# Altium PCB Headstage_Bottom_Plate.PcbDoc
Units mm, origin at the board's own origin, x right, y up, seen from the top; angles counter-clockwise.
Board outline 116.78 x 116.84 mm, 4 copper layers (Top Copper Layer, Internal Copper Layer 1, Internal Copper Layer 2, Bottom Copper Layer), stack 1.58 mm thick; 8 components, 100 nets, 24 pads, 16 vias.
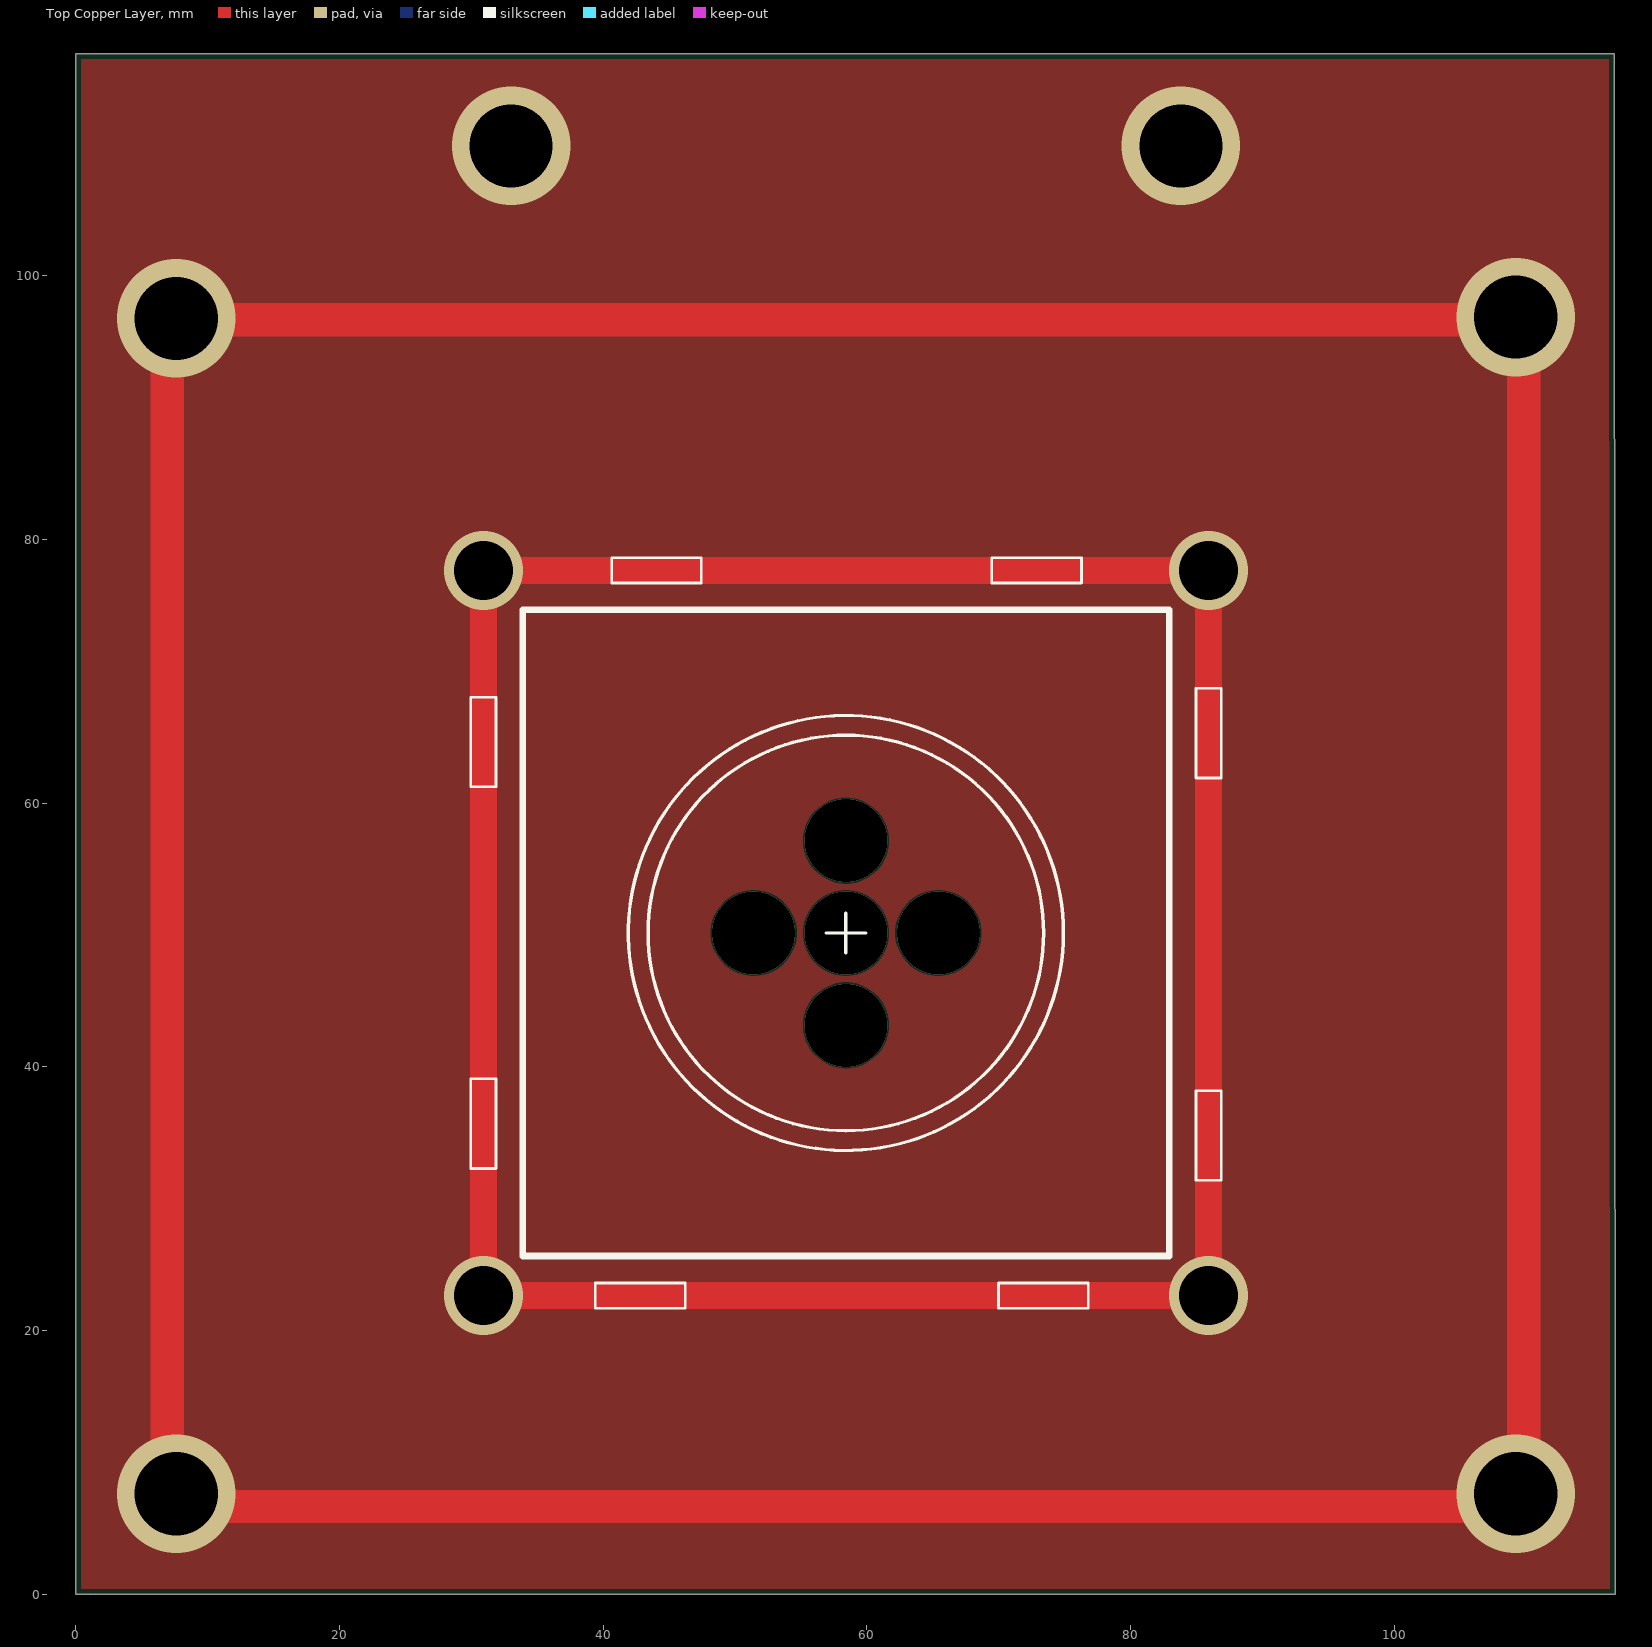
[diagram p0: Top Copper Layer view]
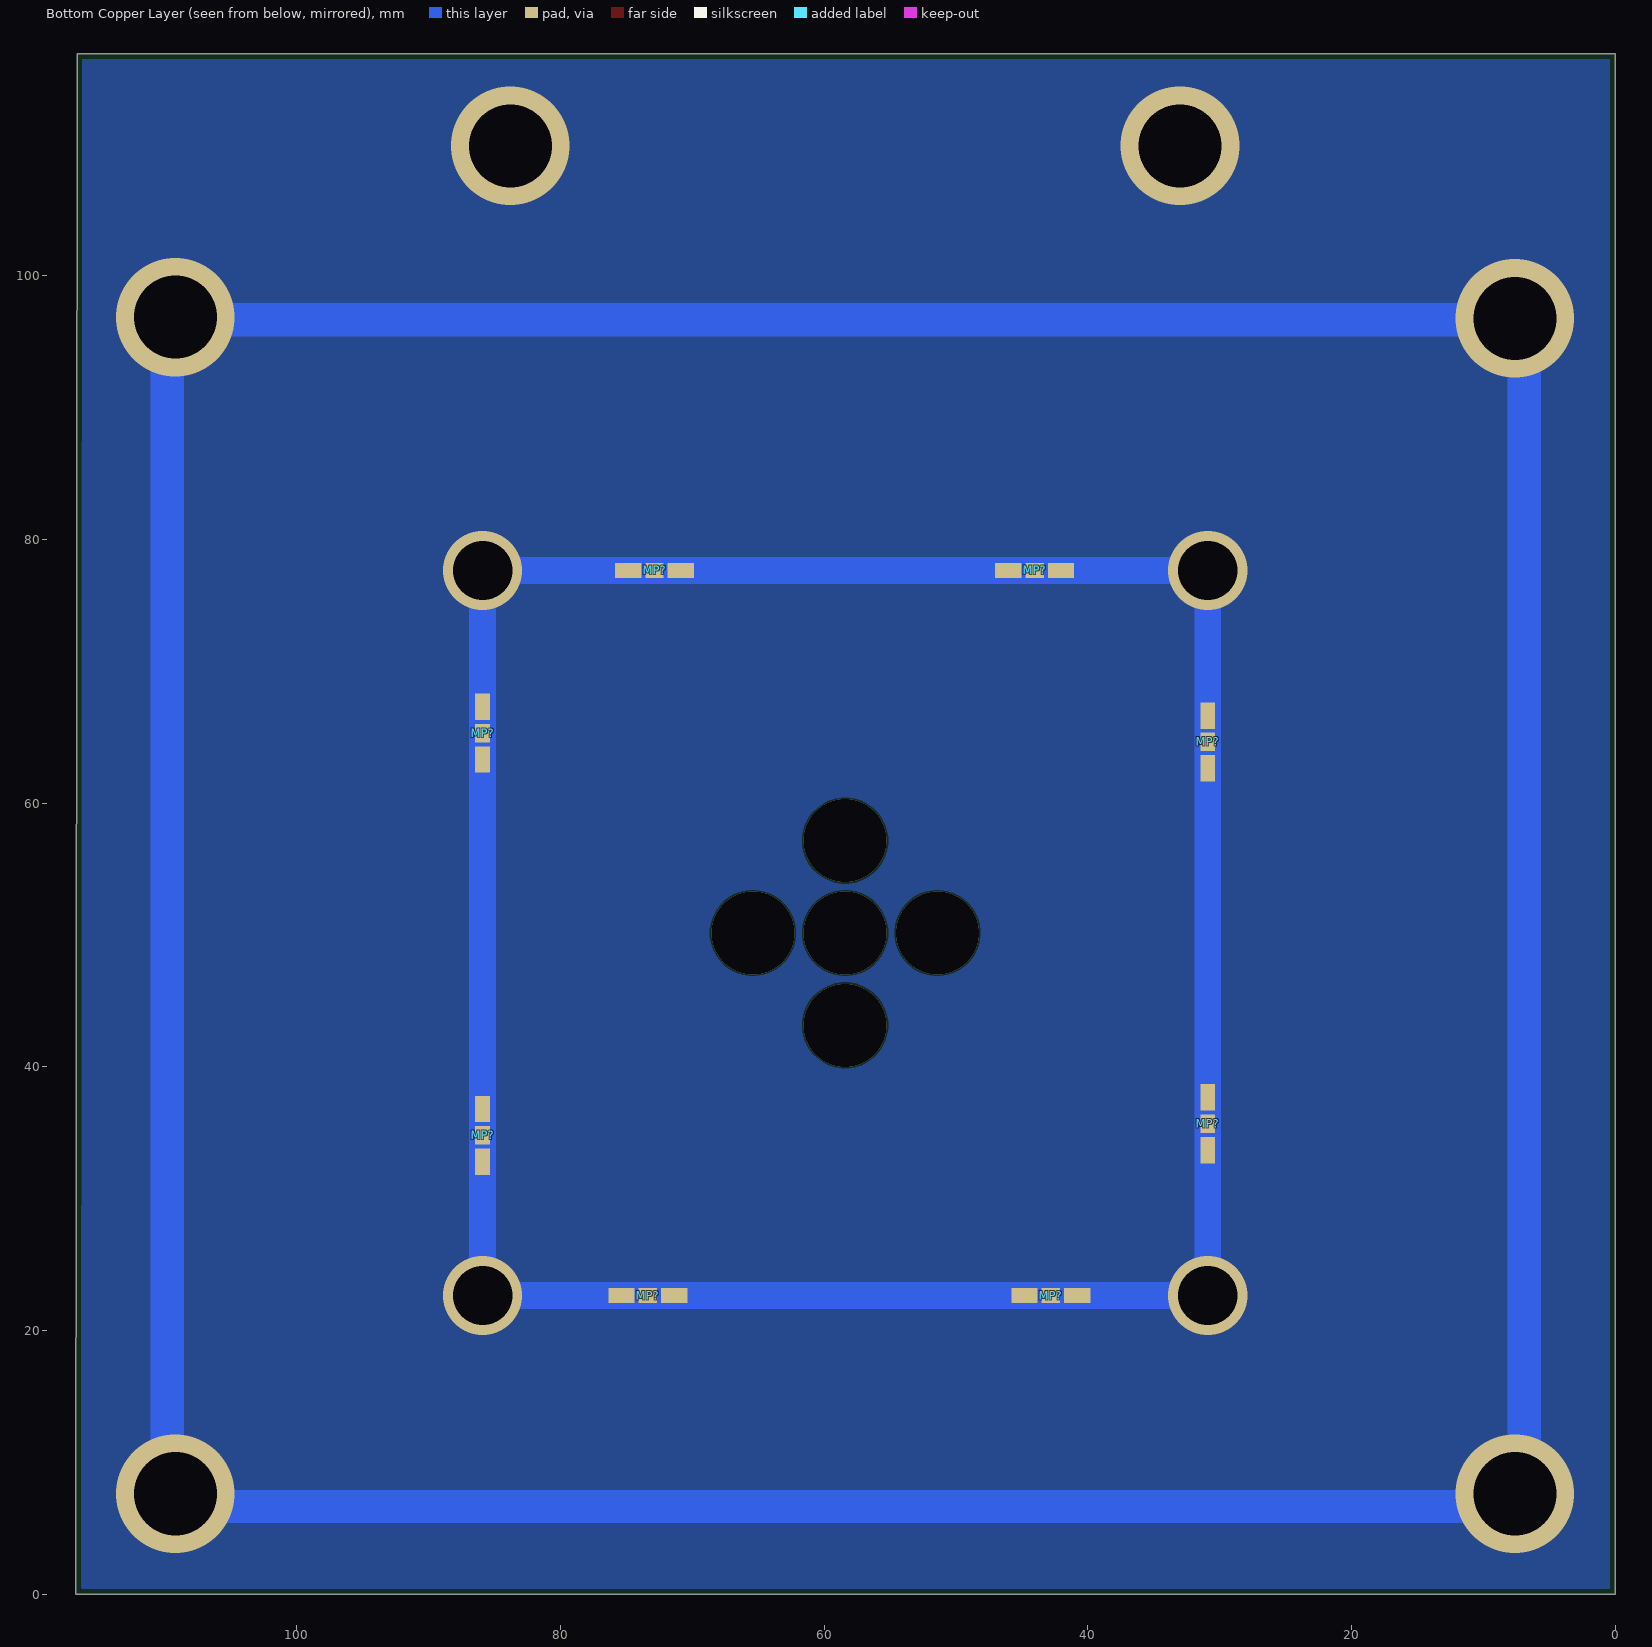
[diagram p1: Bottom Copper Layer view, seen from below]
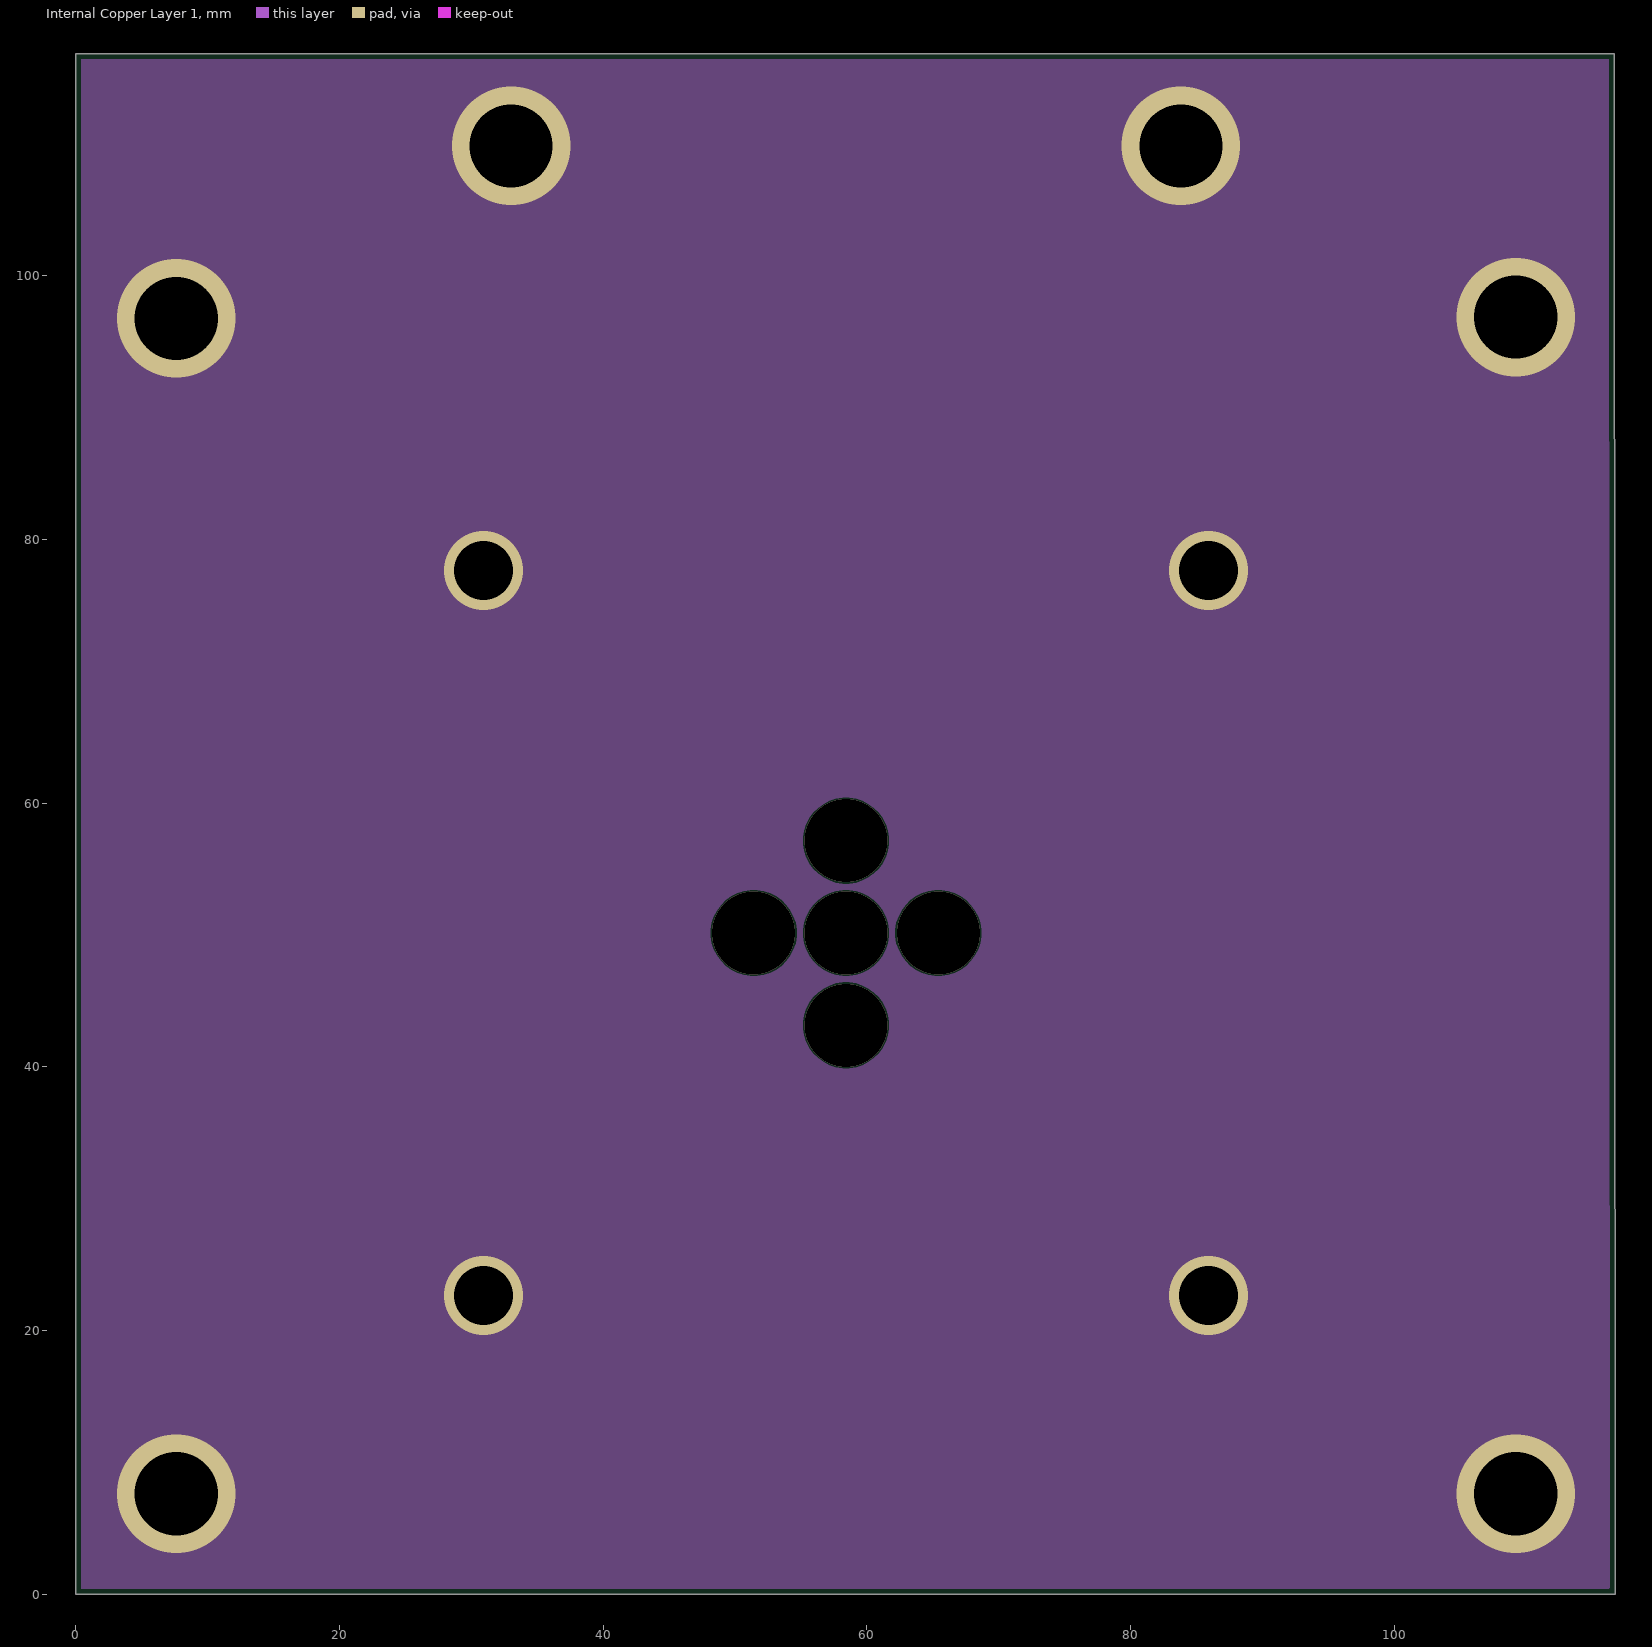
[diagram p2: Internal Copper Layer 1]
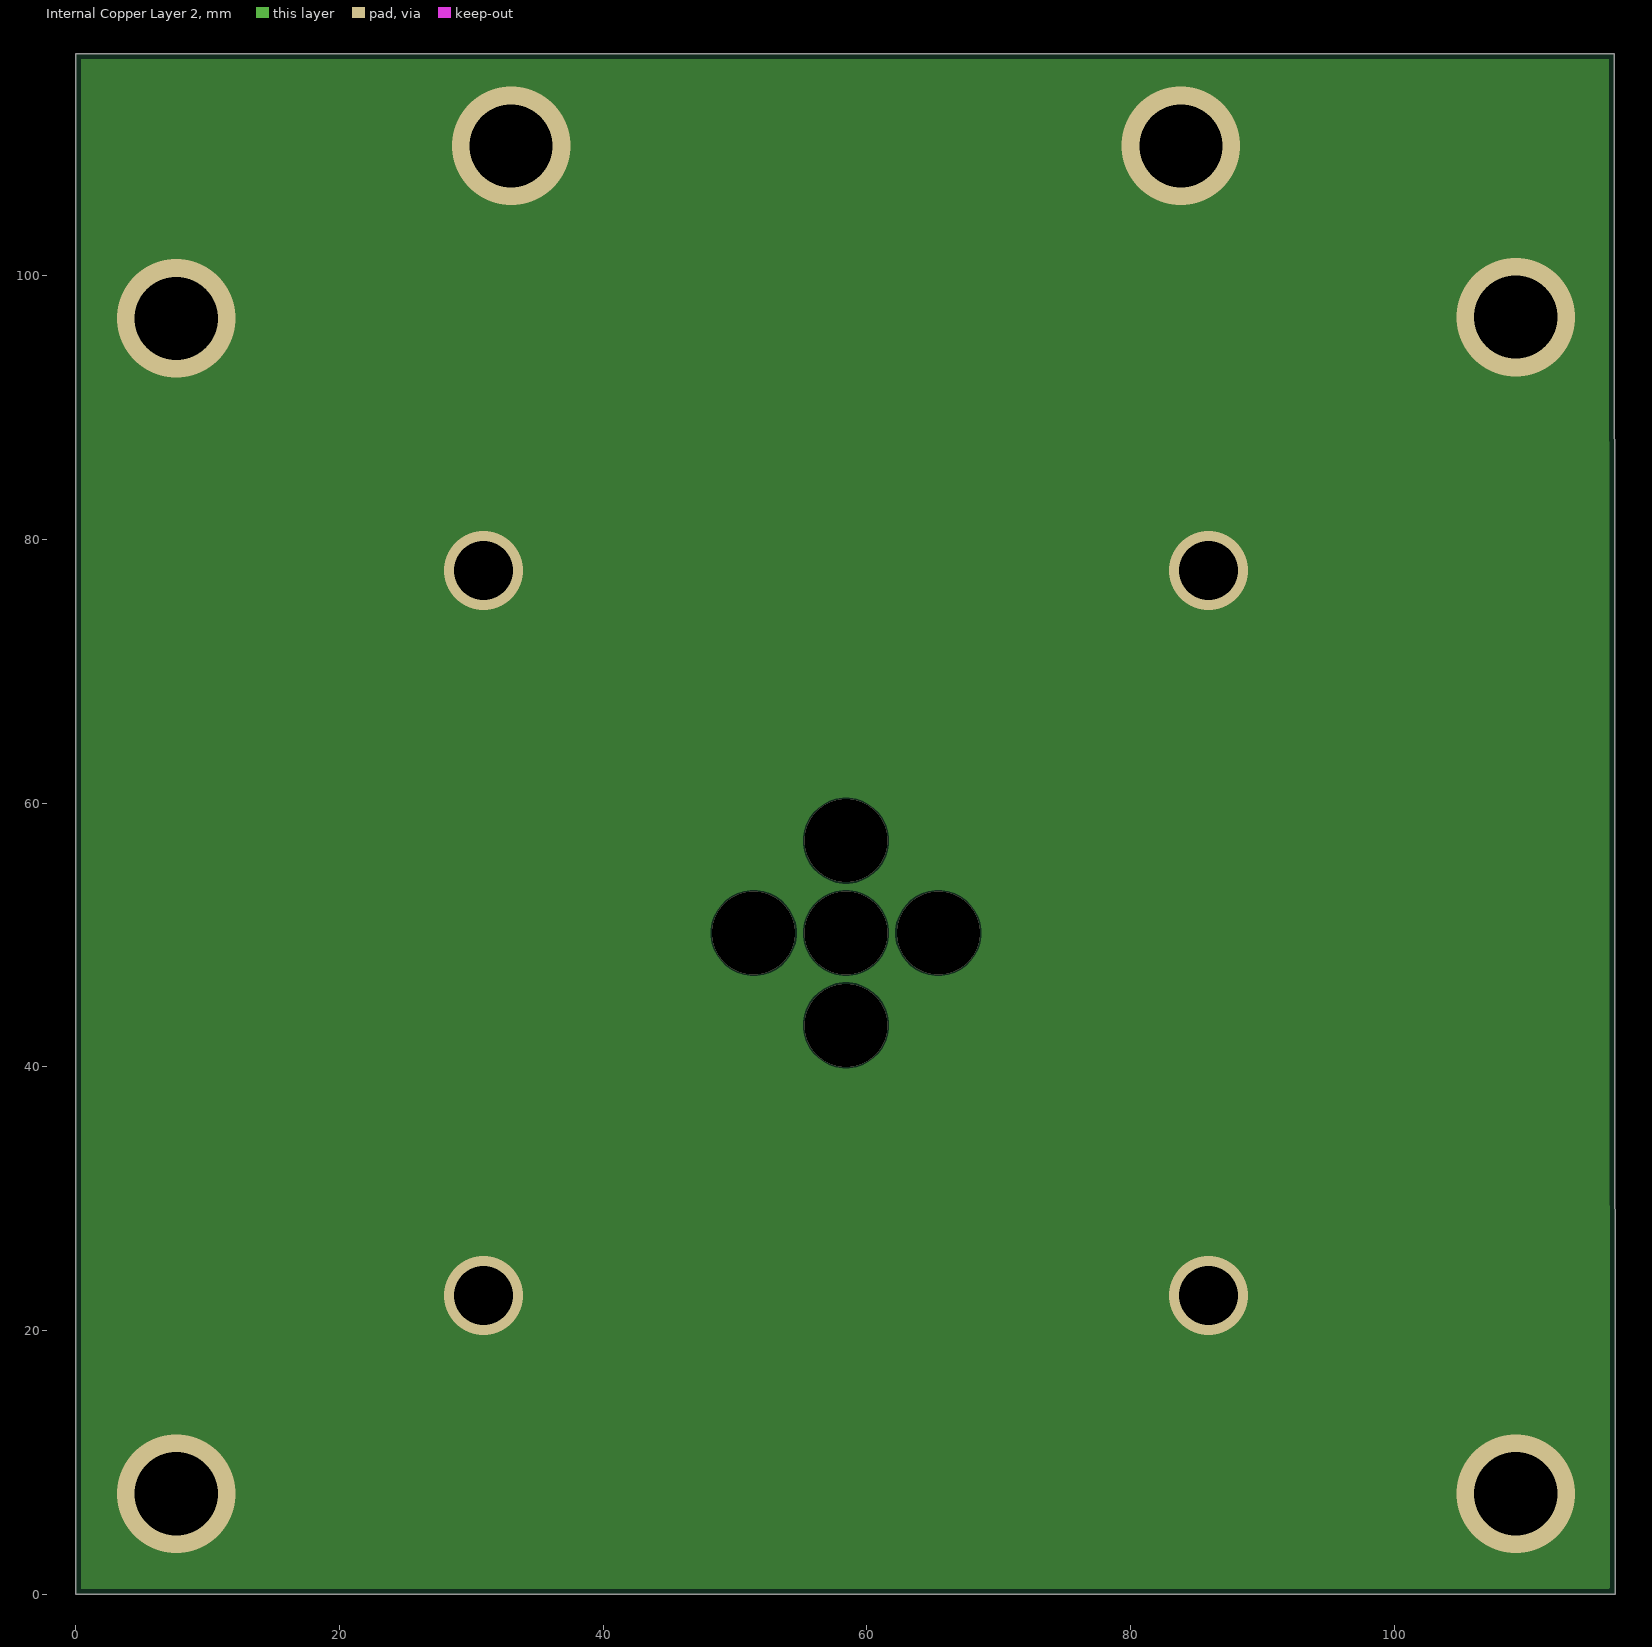
[diagram p3: Internal Copper Layer 2]
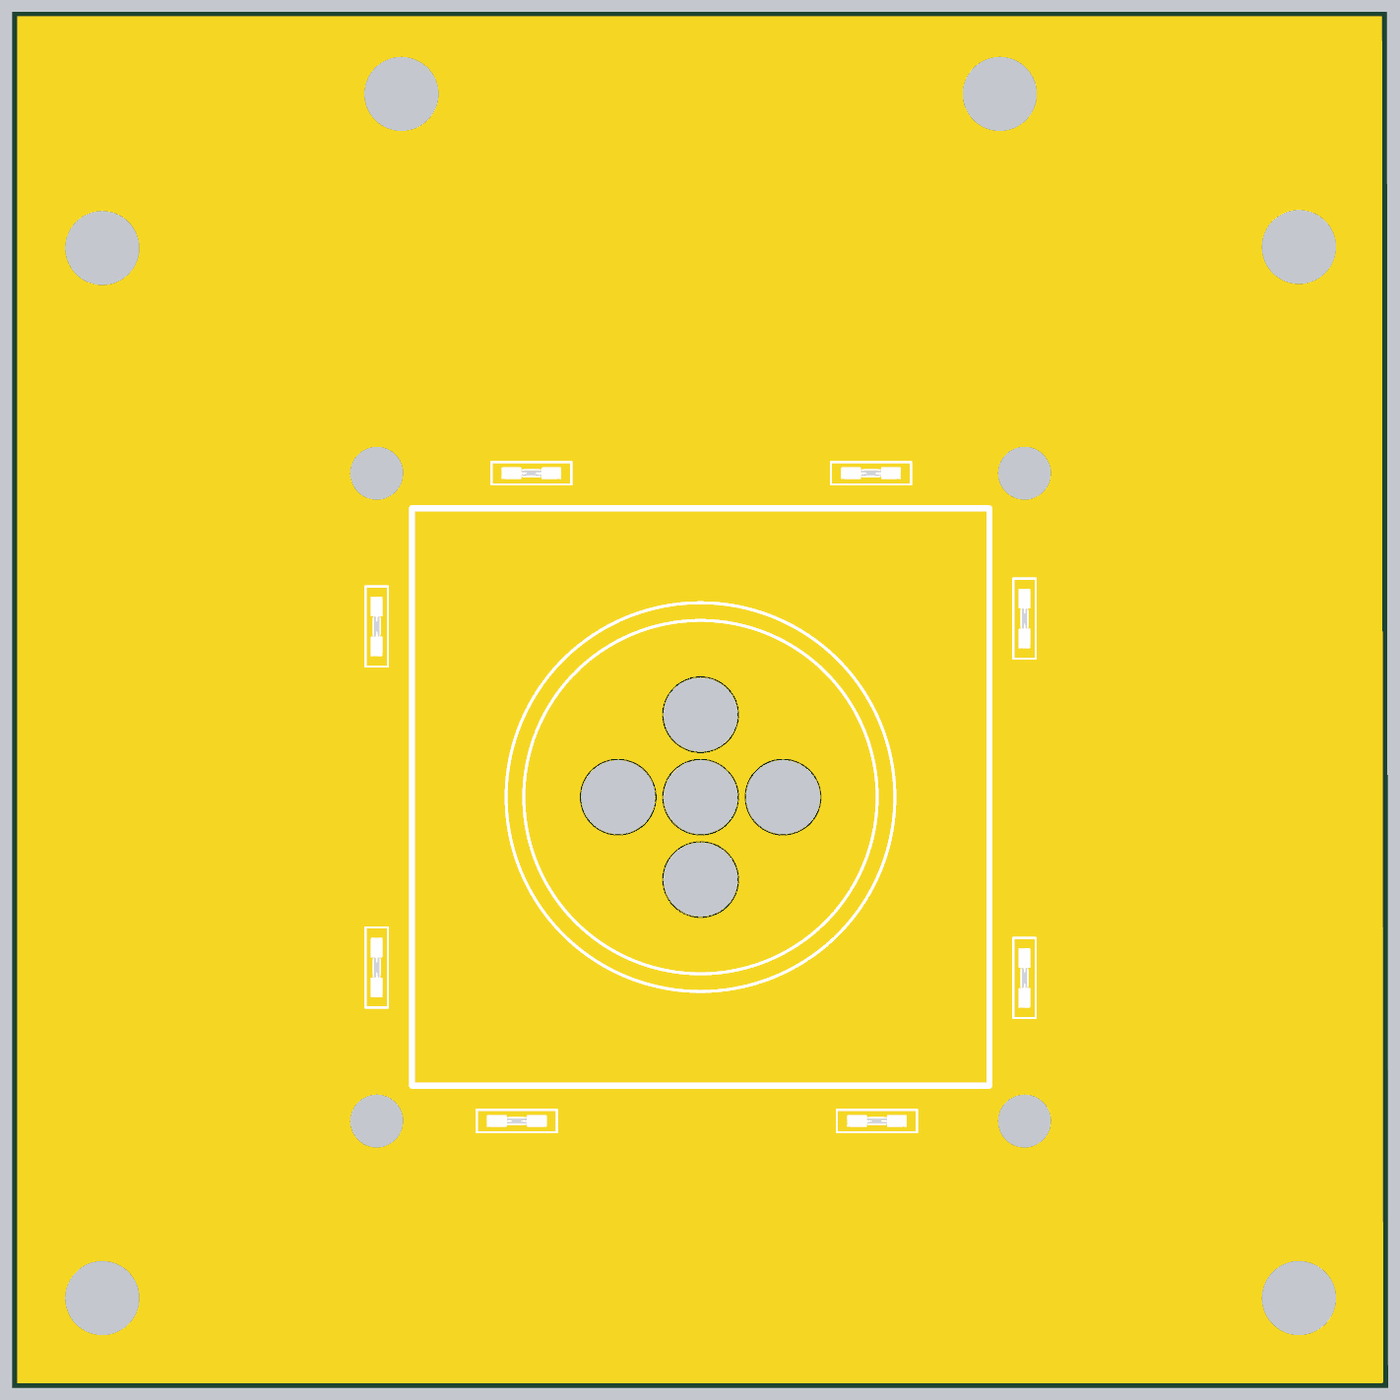
[diagram p4: 3D render of the assembled board from above, using the file's embedded part models]

## Layer stack, top to bottom
Top Solder: solder mask 0.01, Solder Resist, Dk 3.5
Top Copper Layer: signal copper 0.035
Dielectric 1: prepreg 0.22, FR-4, Dk 4.2
Internal Copper Layer 1: signal copper 0.035
Dielectric 2: core 1, FR-4, Dk 4.2
Internal Copper Layer 2: signal copper 0.035
Dielectric 3: prepreg 0.22, FR-4, Dk 4.2
Bottom Copper Layer: signal copper 0.035
Bottom Solder: solder mask 0.01, Solder Resist, Dk 3.5

## Board outline
0,0 116.776,0 116.678,116.84 0,116.84

## Design rules (kind name [scope] priority, off if disabled: settings)
BoardOutlineClearance [All] p1: gap=0.4 ignorepadtopadclearanceinfootprint=FALSE
Clearance [All] p1: gap=0.102 ignorepadtopadclearanceinfootprint=TRUE
ComponentClearance [All] p1: gap=0.15 collisioncheckmode=3 verticalgap=0.15 showdistances=FALSE
DiffPairsRouting [All] p1: maxlimit=0.254 minlimit=0.254 mostfreqgap=0.254 toplayer_minwidth=0.381 toplayer_maxwidth=0.381 toplayer_prefwidth=0.381 midlayer1_minwidth=0.381 midlayer1_maxwidth=0.381 midlayer1_prefwidth=0.381 midlayer2_minwidth=0.381 midlayer2_maxwidth=0.381 midlayer2_prefwidth=0.381 bottomlayer_minwidth=0.381 bottomlayer_maxwidth=0.381 bottomlayer_prefwidth=0.381 maxuncoupledlength=12.7
HoleSize [All] p1: absolutevalues=TRUE maxlimit=0.4 minlimit=0.25 maxpercent=80.000 minpercent=20.000
HoleToHoleClearance [All] p1: gap=0.45 allowstackedmicrovias=TRUE
MinimumAnnularRing [All] p1: minimumring=0.15
MinimumSolderMaskSliver [All] p1: minsoldermaskwidth=0.15
PlaneClearance [All] p1: clearance=0.15
PlaneConnect [All] p1: planeconnectstyle=Direct reliefexpansion=0.25 reliefentries=4 reliefconductorwidth=0.15 reliefairgap=0.15
PolygonConnect [All] p1: connectstyle=Direct reliefconductorwidth=0.15 reliefentries=4 polygonreliefangle="90 Angle" airgapwidth=0.15
RoomDefinition Headstage_V002 [InComponentClass('Headstage_V002')] p1 off: confinementstyle=ConfineIn formatcopy=TRUE lockcomponents=FALSE outline 0,0 50.8,0 50.8,25.4 0,25.4
RoutingVias [All] p1: holewidth=0.25 width=0.55 viastyle="Through Hole" minholewidth=0.25 minwidth=0.55 maxholewidth=0.4 maxwidth=0.8
SilkToSilkClearance [All] p1: silktosilkclearance=0.2
SilkToSolderMaskClearance [IsPad] p1: minsilkscreentomaskgap=0.2 clearancetoexposedcopper=TRUE
SolderMaskExpansion [All] p1: expansion=0.15 istentingtop=FALSE
Width [All] p1: maxlimit=50 minlimit=0.15 preferedwidth=0.15
21 further rules are at their usual default settings.

## Classes and differential pairs
component class Headstage_V002: MP?
differential pair SCLK1h: +SCLK1h_P -SCLK1h_N
differential pair nCS1h: +nCS1h_P -nCS1h_N
differential pair MOSI1h: +MOSI1h_P -MOSI1h_N
differential pair MISO1h: +MISO1h_P -MISO1h_N

## Components (designator, comment, footprint, x,y, rotation, side; value= is the part's Value field where it differs from the comment)
MP? "S0971-46R" FP-S0971-46R-MFG 30.92,64.643 r90 top
MP? "S0971-46R" FP-S0971-46R-MFG 72.881,77.652 r180 top
MP? "S0971-46R" FP-S0971-46R-MFG 44.052,77.652 r180 top
MP? "S0971-46R" FP-S0971-46R-MFG 85.92,65.31 r90 top
MP? "S0971-46R" FP-S0971-46R-MFG 73.389,22.652 r180 top
MP? "S0971-46R" FP-S0971-46R-MFG 30.92,35.687 r90 top
MP? "S0971-46R" FP-S0971-46R-MFG 42.814,22.652 r180 top
MP? "S0971-46R" FP-S0971-46R-MFG 85.92,34.798 r90 top

## Footprints (in the part's own frame and the unit in brackets; to place one, negate y for a bottom-side part, rotate by r counter-clockwise, add the part's x,y. Pads: shape width x height; smd on the part's side, far side on the other; paste and mask are expansions set on the pad)
FP-S0971-46R-MFG [mm]
  rect 2x1.125 smd far side paste+0: 1(-2,0) 1(2,0)
  rect 1.4x1.125 smd far side paste+0: 1(0,0)
  silkscreen extent -3.4,-0.95 3.4,0.95, body extent -2.54,-0.5 2.54,0.5, height 2.18

## Part data
MP? MP? MP? MP? MP? MP? MP? MP?: library part CMP-15817-000004-1, "RFI SHIELD CLIP MINI TIN SMD", Manufacturer=Harwin, Temperature="-25°C to +150°C", Temperature Range High=+150°C, Temperature Range Low=-25°C, Automotive=No, Category=UNK, ComponentLink2Description=Datasheet, ComponentLink2URL=https://cdn.harwin.com/pdfs/S0971-46R.pdf, Conn Orientation=Vertical, Contact Material=Tin,Nickel, Device Class L1=Connectors, Device Class L2=unset, Device Class L3=unset, Digikey Description="RFI SHIELD CLIP MINI TIN SMD", Height=2.1mm, Is Female=yes, Lead Free=Yes, Manufacturer Part Number=S0971-46R, Mouser Description="EZ-Shield Clip, SMT, Mini, Stainless Steel, tin, Tape & Reeled", Number Of Contacts=1, Octopart=https://octopart.com/s0971-46r-harwin-30988305, Package=S0971-46R, RoHS=TRUE

## Via types
v1: diameter 6.3, hole 6.3, Top Copper Layer to Bottom Copper Layer, 6 vias
v2: diameter 9, hole 6.3, Top Copper Layer to Bottom Copper Layer, 6 vias
v3: diameter 6, hole 4.5, Top Copper Layer to Bottom Copper Layer, 4 vias

## Nets (pads, with @x,y where several pads share a name; then routed paths per layer and width w, separated by ;. In a path a pad name is that pad's centre, name@x,y a point inside that pad or via, vN(x,y) a via of type N, cw(c..) or ccw(c..) an arc to the next point about the centre after c; other vN are vias at no path point)
E1_0: 
E1_1: 
E1_2: 
E1_3: 
E1_4: 
E1_5: 
E1_6: 
E1_7: 
E1_8: 
E1_9: 
E1_10: 
E1_11: 
E1_12: 
E1_13: 
E1_14: 
E1_15: 
E2_0: 
E2_1: 
E2_2: 
E2_3: 
E2_4: 
E2_5: 
E2_6: 
E2_7: 
E2_8: 
E2_9: 
E2_10: 
E2_11: 
E2_12: 
E2_13: 
E2_14: 
E2_15: 
E3_0: 
E3_1: 
E3_2: 
E3_3: 
E3_4: 
E3_5: 
E3_6: 
E3_8: 
E3_9: 
E3_10: 
E3_11: 
E3_12: 
E3_13: 
E3_14: 
E3_15: 
E4_0: 
E4_1: 
E4_2: 
E4_3: 
E4_4: 
E4_5: 
E4_6: 
E4_7: 
E4_8: 
E4_9: 
E4_10: 
E4_11: 
E4_12: 
E4_13: 
E4_14: 
E4_15: 
GND: MP?.1 | length 1213.5
  Top Copper Layer w2.032: v3(30.92,22.652) 30.92,33.687 30.92,35.687 30.92,37.687 30.92,62.643 30.92,64.643 30.92,66.643 v3(30.92,77.652) 42.052,77.652 44.052,77.652 46.052,77.652 70.881,77.652 72.881,77.652 74.881,77.652 v3(85.92,77.652) 85.92,67.31 85.92,65.31 85.92,63.31 85.92,36.798 85.92,34.798 85.92,32.798 v3(85.92,22.652) 75.389,22.652 73.389,22.652 71.389,22.652 44.814,22.652 42.814,22.652 40.814,22.652 v3(30.92,22.652)
  Top Copper Layer w2.54: v2@6.92,96.652 v2@109.92,96.652 ; v2@6.92,96.774 6.92,6.652 v2@109.92,6.652 ; v2@109.711,96.774 109.838,96.901 v2@109.838,6.35
  Bottom Copper Layer w2.032: v3(30.92,22.652) 30.92,33.687 30.92,35.687 30.92,37.687 30.92,62.643 30.92,64.643 30.92,66.643 v3(30.92,77.652) 42.052,77.652 44.052,77.652 46.052,77.652 70.881,77.652 72.881,77.652 74.881,77.652 v3(85.92,77.652) 85.92,67.31 85.92,65.31 85.92,63.31 85.92,36.798 85.92,34.798 85.92,32.798 v3(85.92,22.652) 75.389,22.652 73.389,22.652 71.389,22.652 44.814,22.652 42.814,22.652 40.814,22.652 v3(30.92,22.652)
  Bottom Copper Layer w2.54: v2@6.92,96.652 v2@109.92,96.652 ; v2@6.92,96.774 6.92,6.652 v2@109.92,6.652 ; v2@109.838,6.35 v2@109.838,96.863
  other v2: 7.62,7.62 109.22,7.62 7.62,96.774 109.22,96.863 33.02,109.855 83.82,109.855
M1_MISON: 
M1_MISOP: 
M1_MOSIN: 
M1_MOSIP: 
M2_MISON: 
M2_MISOP: 
M2_MOSIN: 
M2_MOSIP: 
M3_MISON: 
M3_MISOP: 
M3_MOSIN: 
M3_MOSIP: 
M4_MISON: 
M4_MISOP: 
M4_MOSIN: 
M4_MOSIP: 
M14_CSN: 
M14_CSP: 
M14_SCLKN: 
M14_SCLKP: 
M23_CSN: 
M23_CSP: 
M23_SCLKN: 
M23_SCLKP: 
MISO1h_N: 
MISO1h_P: 
MOSI1h_N: 
MOSI1h_P: 
nCS1h_N: 
nCS1h_P: 
SCLK1h_N: 
SCLK1h_P: 
VDD: 
VREF: 
VSTIMN: 
VSTIMP: 
copper on no net:
  other v1: 58.42,43.152 51.42,50.152 58.42,50.152 58.42,50.152 65.42,50.152 58.42,57.152

## Polygon pours and split planes (outlines as drawn)
GND on Top Solder "GND_L01_P008" (solid, pour order 8): 117.175,0 0,0 0,116.84 117.175,116.84
no net on Bottom Solder "NONET_L04_P011" (solid, pour order 11): 0,0 117.267,0 117.267,116.84 0,116.84
GND on Bottom Copper Layer "GND_L04_P014" (solid, pour order 14): 0,0 117.267,0 117.267,116.84 0,116.84
GND on Top Copper Layer "GND_L01_P012" (solid, pour order 12): 117.175,0 0,0 0,116.84 117.175,116.84
GND on Internal Copper Layer 2 "GND_L03_P009" (solid, pour order 9): 0,0 117.267,0 117.267,116.84 0,116.84
GND on Internal Copper Layer 1 "GND_L02_P013" (solid, pour order 13): 0,0 117.267,0 117.267,116.84 0,116.84

## Silkscreen, mask and mechanical layers (free items; w line width, h text height)
Top Overlay:
  circle w0.254: c58.409,50.154 r15
  circle w0.254: c58.409,50.154 r16.5
  lines w0.254: 56.909,50.154 59.909,50.154 ; 58.409,48.654 58.409,51.654
  lines w0.508: 33.909,25.654 33.909,74.676 82.931,74.676 82.931,25.654 33.909,25.654